# Altium PCB 电源小板.PcbDoc
Units mil, origin at the board's own origin, x right, y up, seen from the top; angles counter-clockwise.
Board outline 970 x 955 mil, 2 copper layers (Top Layer, Bottom Layer); 20 components, 12 nets, 68 pads, 38 vias.
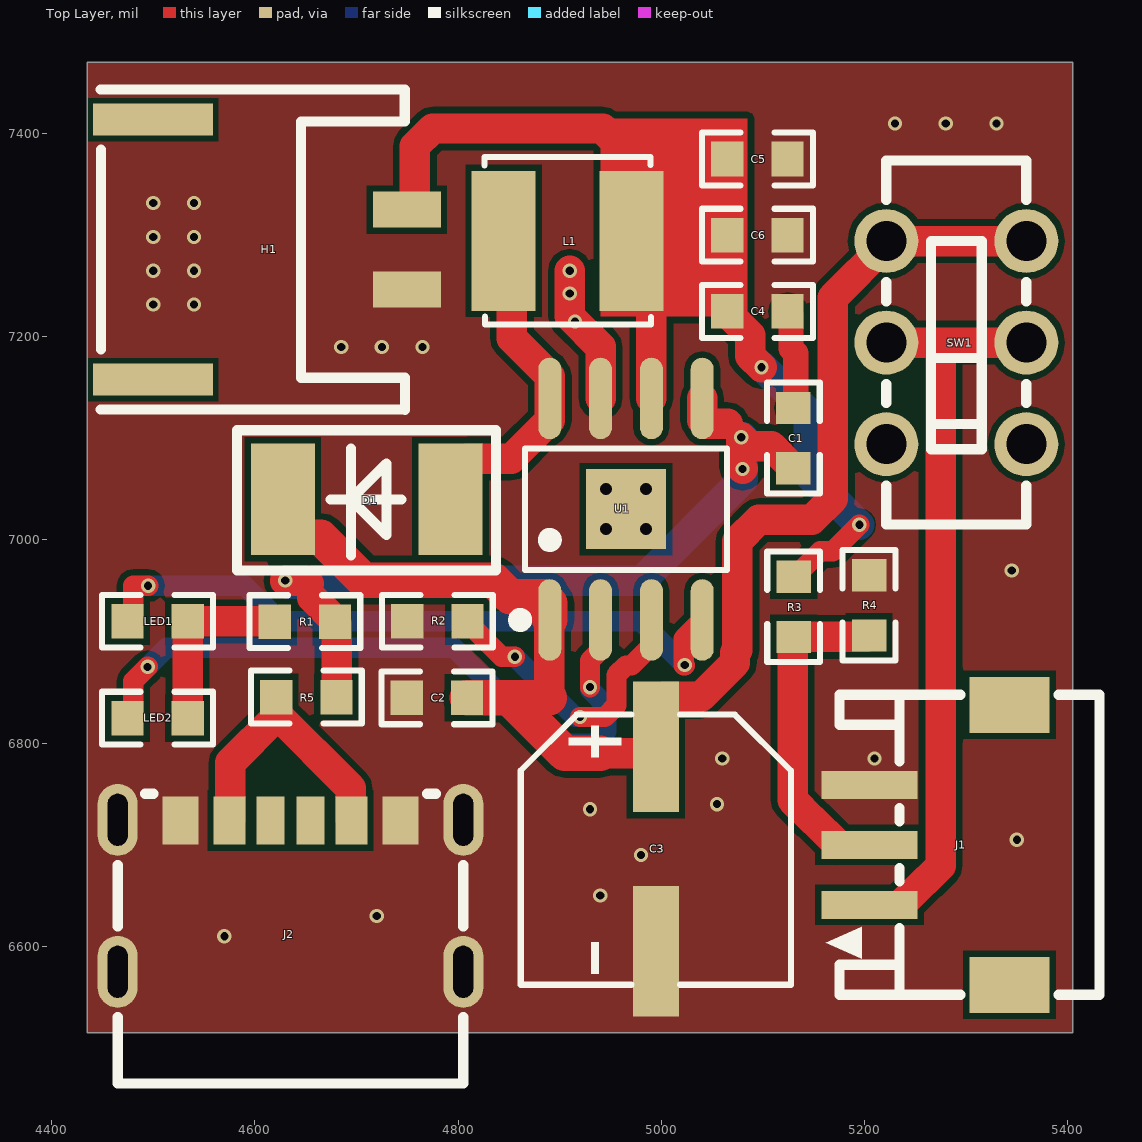
[diagram p0: Top Layer view]
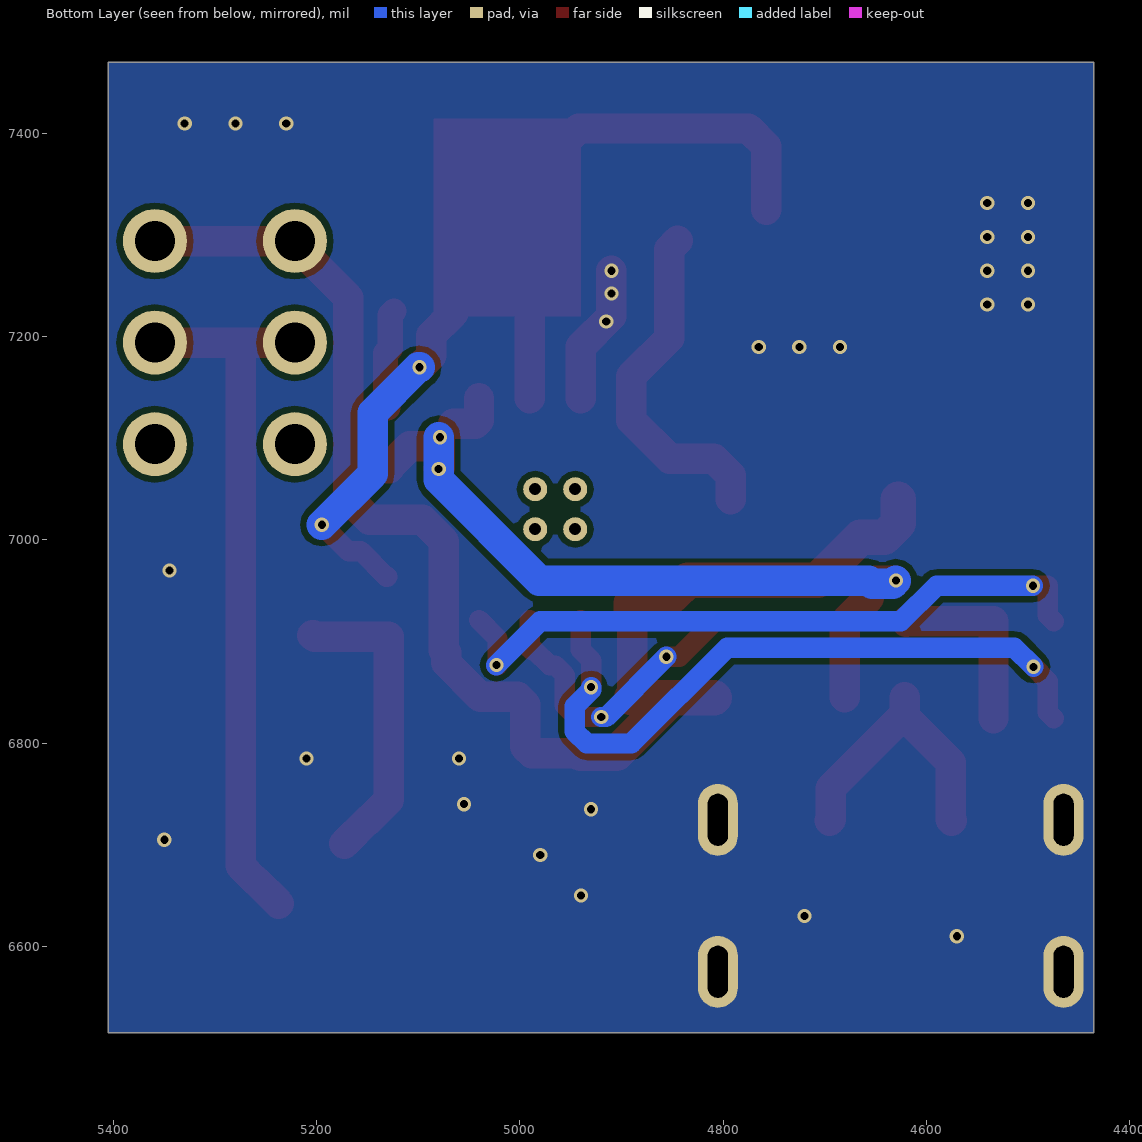
[diagram p1: Bottom Layer view, seen from below]
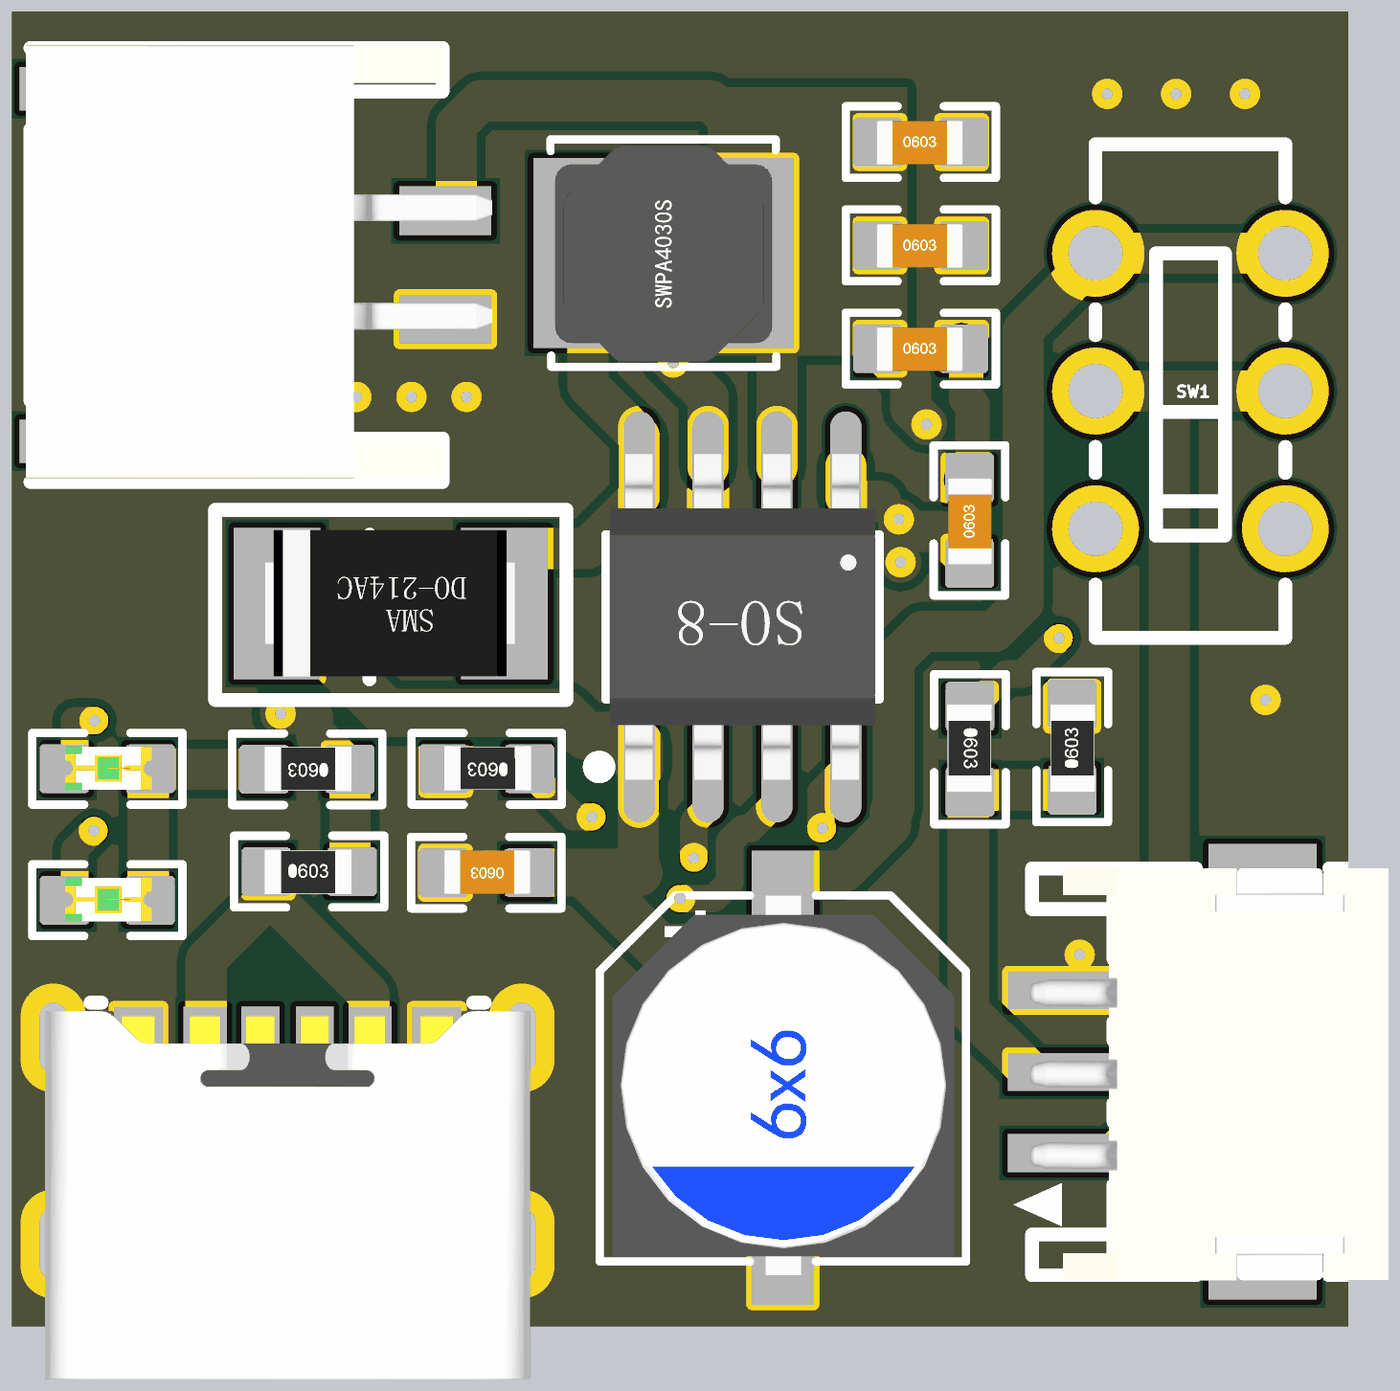
[diagram p2: 3D render of the assembled board from above, using the file's embedded part models]

## Layer stack, top to bottom
Top Solder: solder mask 0.4, Solder Resist, Dk 3.5
Top Layer: signal copper 1.4
Dielectric 1: dielectric 12.6, FR-4, Dk 4.8
Bottom Layer: signal copper 1.4
Bottom Solder: solder mask 0.4, Solder Resist, Dk 3.5

## Board outline
4435,6515 5405,6515 5405,7470 4435,7470

## Design rules (kind name [scope] priority, off if disabled: settings)
Clearance [All] p1: gap=6 ignorepadtopadclearanceinfootprint=FALSE
PlaneConnect [All] p1: planeconnectstyle=Direct reliefexpansion=20 reliefentries=4 reliefconductorwidth=10 reliefairgap=10
PolygonConnect [All] p1: connectstyle=Direct reliefconductorwidth=10 reliefentries=4 polygonreliefangle="90 Angle" airgapwidth=10
RoutingVias [All] p1: holewidth=8 width=14 viastyle="Through Hole" minholewidth=8 minwidth=14 maxholewidth=20 maxwidth=38
SolderMaskExpansion [All] p1: expansion=4 istentingtop=FALSE
Width [All] p1: maxlimit=50 minlimit=10 preferedwidth=10
29 further rules are at their usual default settings.

## Components (designator, comment, footprint, x,y, rotation, side; value= is the part's Value field where it differs from the comment)
C1 "10uf" 0603-CAP 5130.39,7099.6 r90 top
C2 "0.1uf" 0603-CAP 4780,6845 r180 top
C3 "47uf" 电解电容 5000,6690 r90 top
C4 "0.1uf" 0603-CAP 5093.91,7224.61 r0 top
C5 "22uf" 0603-CAP 5093.91,7374.61 r0 top
C6 "22uf" 0603-CAP 5093.91,7299.61 r0 top
D1 "二极管" DO-214AC 4710,7040 r180 top
H1 "电池接口" PH2.0 4590,7290 r90 top
J1 "VCC_OUT" ZH1.5 5314.29,6704.26 r90 top
J2 "Type-c接口" TYPE-C 4630,6610 r0 top
L1 "10uH" 功率电感 4905,7290 r0 top
LED1 "发光二极管" 0603-LED 4505,6920.39 r180 top
LED2 "发光二极管" 0603-LED 4505,6825 r180 top
R1 "电阻" 0603-RES 4650,6920 r180 top
R2 "电阻" 0603-RES 4780.4,6920.39 r180 top
R3 "电阻" 0603-RES 5130,6935 r270 top
R4 "电阻" 0603-RES 5205,6935 r90 top
R5 "电阻" 0603-RES 4650,6845 r0 top
SW1 "侧开关" 开关 5290,7195 r270 top
U1 "TP5400" TP5400 4965.31,7030.32 r0 top

## Footprints (in the part's own frame and the unit in brackets; to place one, negate y for a bottom-side part, rotate by r counter-clockwise, add the part's x,y. Pads: shape width x height; smd on the part's side, far side on the other; paste and mask are expansions set on the pad)
0603-CAP [mm]
  rect 0.806x0.864 smd: 1(-0.734,0.01) 2(0.772,0.01)
  silkscreen extent -1.37,-0.65 1.4,0.67, body extent -0.8,-0.41 0.8,0.41, height 0.84
0603-LED [mm]
  rect 0.806x0.864 smd: 1(-0.734,0.01) 2(0.772,0.01)
  silkscreen extent -1.37,-0.65 1.4,0.67, body extent -0.8,-0.4 0.8,0.4, height 0.47
0603-RES [mm]
  rect 0.806x0.864 smd: 1(-0.734,0.01) 2(0.772,0.01)
  silkscreen extent -1.37,-0.65 1.4,0.67, body extent -0.8,-0.41 0.8,0.41, height 0.45
DO-214AC [mil]
  rect 63x110 smd: 1(-82.5,0) 2(82.5,0)
  silkscreen extent -128,-68 128,70, body extent -90,-53 91,53, height 94
PH2.0 [mm]
  rect 0.9x1.7 smd: 1(0.892,-4.054) 2(-1.108,-4.054)
  rect 0.8x3 smd: 3(-3.358,2.296) 4(3.142,2.296)
  silkscreen extent -4.11,-4 3.89,3.6, body extent -4.05,-4.92 3.95,3.68, height 5.55
TP5400 [mm]
  oval 0.574x2.038 smd: 1(-1.905,-2.769) 2(-0.635,-2.769) 3(0.635,-2.769) 4(1.905,-2.769) 5(1.905,2.769) 6(0.635,2.769) 7(-0.635,2.769) 8(-1.905,2.769)
  rect 2x2 smd: 9(0,0)
  round 0.6 hole 0.3: ""(-0.5,-0.5) ""(-0.5,0.5) ""(0.5,-0.5) ""(0.5,0.5)
  silkscreen extent -2.79,-2.92 2.53,1.52, body extent -2.45,-3 2.45,3, height 1.7
TYPE-C [mm]
  oval 1x1.8 hole 0.5 slot 1.3 at 90 deg: 1(-4.191,2.911) 2(-4.191,-0.889) 3(4.449,-0.889) 4(4.449,2.911)
  rect 0.7x1.2 smd: 5(-0.371,2.891) 8(0.629,2.891)
  rect 0.8x1.2 smd: 6(-1.391,2.891) 9(1.649,2.891)
  rect 0.9x1.2 smd: 7(-2.621,2.891) 10(2.879,2.891)
  silkscreen extent -4.19,-3.68 4.45,3.56, body extent -4.34,-3.39 4.6,3.41, height 3.22
ZH1.5 [mm]
  rect 0.7x2.4 smd: 1(-1.608,2.776) 2(-0.108,2.776) 3(1.392,2.776)
  rect 1.4x2 smd: 4(3.392,-0.724) 5(-3.608,-0.724)
  silkscreen extent -3.86,-2.97 3.64,3.88, body extent -3.95,-3.04 3.65,3.56, height 3.75
功率电感 [mm]
  rect 1.6x3.5 smd: 1(-1.527,0.112) 2(1.673,0.112)
  silkscreen extent -2.01,-1.98 2.16,2.21, body extent -1.92,-1.9 2.08,2.1, height 3
开关 [mm]
  round 1.6 hole 1: 1(-2.521,1.76) 1(-2.521,-1.74) 2(0.019,1.76) 2(0.019,-1.74) 3(2.559,1.76) 3(2.559,-1.74)
  silkscreen extent -4.53,-1.74 4.57,1.76, body extent -4.53,-1.74 4.57,1.96, height 7.65
电解电容 [mm]
  rect 3.26x1.15 smd: 1(2.701,0.137) 2(-2.409,0.137)
  silkscreen extent -3.25,-3.24 3.51,3.51, body extent -3.5,-3.02 3.5,3.28, height 6.05

## Part data
C1 C2 C4 C5 C6: library part 电容, "无极性贴片电容"
C3: library part 极性电容, "极性直插电容", name="Cap Pol"
D1: "通用二极管"
H1: "接电池用的"
J2: "接口"
L1: library part 电感, "普通电感", Code_IEC=1005, Code_JEITA=0402, LatestRevisionDate=29-May-2009, LatestRevisionNote="IPC-7351 Footprint Added.", PackageDescription="Chip Inductor", PackageReference=0402-A, Published=8-Jun-2000, Publisher="Altium Limited"
U1: "电源管理芯片"

## Via types
v1: diameter 14, hole 8, Top Layer to Bottom Layer, 38 vias

## Nets (pads, with @x,y where several pads share a name; then routed paths per layer and width w, separated by ;. In a path a pad name is that pad's centre, name@x,y a point inside that pad or via, vN(x,y) a via of type N, cw(c..) or ccw(c..) an arc to the next point about the centre after c; other vN are vias at no path point)
+5: J2.6 J2.9 R5.1 | length 276.3
  Top Layer w30: J2.6 4575.99,6724.57 4575.99,6780.99 4621.09,6826.09 R5.1 ; R5.1@4621.09,6828.94 4694.17,6755.85 4694.17,6724.57 J2.9
BAT: J1.2 R3.2 R4.1 | length 296.6
  Top Layer w30: R3.2@5129.26,6904.6 5129.26,6744.07 5149.06,6724.28 5149.7,6724.28 J1.2@5172.76,6701.22 ; R3.2 5201.99,6904.6 5203.47,6906.09 R4.1
GND: C1.2 C2.2 C3.2 C4.2 C5.2 C6.2 H1.2 J1.3 J2.1 J2.2 J2.3 J2.4 J2.7 J2.10 R2.2 R4.2 U1.7 | length 237.5
  Top Layer w25: C4.2 5127.69,7221.62 5127.69,7188.5 5132.31,7183.88 5132.31,7132.31 C1.2
  Top Layer w30: v1(4910,7265) v1(4910,7242.65) 4910,7220.3 4940.31,7189.99 U1.7
  other v1: 4570,6610 4720,6630 4940,6650 4980,6690 5350,6705 4930,6735 5055,6740 5060,6785 5210,6785 5345,6970 4685,7190 4725,7190 4765,7190 4915,7215 4500,7231.67 4540,7231.67 4500,7265 4540,7265 4500,7298.33 4540,7298.33 4500,7331.67 4540,7331.67 5230,7410 5280,7410 5330,7410
NetC1_1: C1.1 R1.1 R5.2 U1.5 | length 812.2
  Top Layer w30: v1(4630,6960) 4650,6960 4653.24,6956.76 ; 4656.48,6943.17 4678.91,6920.74 R1.1 4678.91,6918.47 4680.4,6916.99 R5.2 ; U1.5 5040.31,7117.92 5044.01,7114.22 5065.43,7114.22 ; v1(5080,7070) 5078.73,7071.27 v1(5078.73,7101.13) 5087.43,7092.43 5108.26,7092.43 5127.99,7072.7 5127.99,7071.57 5128.87,7070.69 C1.1
  Bottom Layer w30: v1(4630,6960) 4633.24,6956.76 4653.24,6956.76 4656.48,6960 4980.77,6960 5080,7059.23 v1(5080,7070) v1@5080,7101.13
NetC2_1: C2.1 C3.1 D1.2 SW1.1 U1.1 | length 1444.4
  Top Layer w30: 4889.7,6844.61 4889.7,6920.69 U1.1 ; 4940,6790 4988.27,6790 C3.1 4994.61,6837.87 5002.24,6845.51 5039.01,6845.51 5072.61,6879.11 5072.61,6888.98 5075,6891.37 5075,6998.95 5095.84,7019.79 5148.16,7019.79 5169,7040.63 5169,7238.57 5221.5,7291.07 5221.5,7294.26 SW1.1@5359.29,7294.26
  Top Layer w35: D1.2 4627.5,7016.5 4641.5,7002.5 4665,7002.5 4706.99,6960.51 4834.92,6960.51 4851.51,6943.92 4884.11,6943.92 4890.31,6937.72 U1.1 ; C2.1 4850.39,6844.61 ; 4889.7,6844.61 4850.39,6844.61 ; 4940,6790 4905,6790 4850.39,6844.61
NetC4_1: C4.1 C5.1 C6.1 H1.1 L1.2 R3.1 U1.6 | length 944.2
  Top Layer w20: R3.1 5131.53,6963.91 5156.4,6988.79 5168.79,6988.79 v1(5195,7015)
  Top Layer w30: H1.1@4757.48,7325.11 4757.48,7387.43 4775.06,7405 4942.27,7405 4959.85,7387.43 4959.85,7346.51 L1.2@4970.88,7335.47 ; L1.2@4967.23,7335.47 L1.2@4970.88,7335.47 ; U1.6 4990.31,7237.59 4970.88,7257.03 L1.2 L1.2@4970.88,7335.47 ; 5007.5,7302.5 4974.53,7335.47 L1.2@4970.88,7335.47 ; C4.1 5065.88,7224.12 5065.88,7222.99 5087.43,7201.43 5087.43,7181.38 v1(5098.81,7170)
  Bottom Layer w30: v1(5098.81,7170) 5100,7170 5145,7125 5145,7065 v1(5195,7015)
NetD1_1: D1.1 L1.1 U1.8 | length 339.2
  Top Layer w30: D1.1 4792.5,7063.5 4809,7080 4852.39,7080 4890.31,7117.92 U1.8 4890.31,7161.33 4853.07,7198.57 4853.07,7286.25 L1.1
NetLED1_1: LED1.1 LED2.1 R1.2 | length 181.2
  Top Layer w30: LED2.1 LED1.1 4534.11,6919.8 4619.4,6919.8 R1.2
NetLED1_2: LED1.2 U1.4 | length 666.1
  Top Layer w20: LED1.2 4480.48,6925.88 4480.48,6955 v1(4495,6955) ; v1(5023.21,6876.85) 5022.86,6876.51 5022.13,6876.51 5022.13,6903.12 U1.4
  Bottom Layer w20: v1(4495,6955) 4590,6955 4625,6920 4980.06,6920 v1(5023.21,6876.85)
NetLED2_2: LED2.2 U1.2 | length 682.8
  Top Layer w20: LED2.2 4480.48,6830.48 4480.48,6861.13 v1(4494.49,6875.15) ; v1(4929.97,6855.16) 4929.97,6881.44 4940.31,6891.78 U1.2
  Bottom Layer w20: v1(4494.49,6875.15) 4513.35,6894 4796,6894 4890.25,6799.75 4934.28,6799.75 4946,6811.46 4946,6836.52 4929.97,6852.55 v1(4929.97,6855.16)
NetR2_1: R2.1 U1.3 | length 294.1
  Top Layer w20: R2.1 4809.31,6918.87 4843.06,6885.11 v1(4855.92,6885.11) ; v1(4920,6825.75) 4944.25,6825.75 4955.97,6837.46 4955.97,6867.14 4965.34,6876.51 4970.76,6876.51 4986.24,6891.99 4989.11,6891.99 4990.31,6893.19 U1.3
  Bottom Layer w20: v1(4855.92,6885.11) 4915.28,6825.75 v1(4920,6825.75)
VCC: J1.1 SW1.2 | length 705.9
  Top Layer w30: SW1.2@5221.5,7194.26 5275,7194.26 ; J1.1@5237.24,6642.17 5260.3,6665.22 5260.94,6665.22 5275,6679.28 5275,7194.26 ; SW1.2@5359.29,7194.26 5275,7194.26
pads on no net: H1.3 H1.4 J1.4 J1.5 J2.5 J2.8 SW1.3 U1. U1.9

## Polygon pours and split planes (outlines as drawn)
GND on Top Layer "GND_L01_P000" (solid, pour order 0): 4435,7470 5405,7470 5405,6515 4435,6515
GND on Bottom Layer "GND_L02_P001" (solid, pour order 1): 4435,7470 5405,7470 5405,6515 4435,6515

## Other copper
Top Layer:
  rectangle net NetC4_1: 4940,7220 5085,7415

## Silkscreen, mask and mechanical layers (free items; w line width, h text height)
Mechanical 1:
  the board outline again, w10